# Altium PCB 2015_AlimBeaconEye.PCBDOC
Units mm, origin at the board's own origin, x right, y up, seen from the top; angles counter-clockwise.
Board outline 60 x 76 mm, 4 copper layers (1-TOP, 2-GND, 3-SIGNAL, 4-BOTTOM); 24 components, 10 nets, 51 pads, 49 vias.
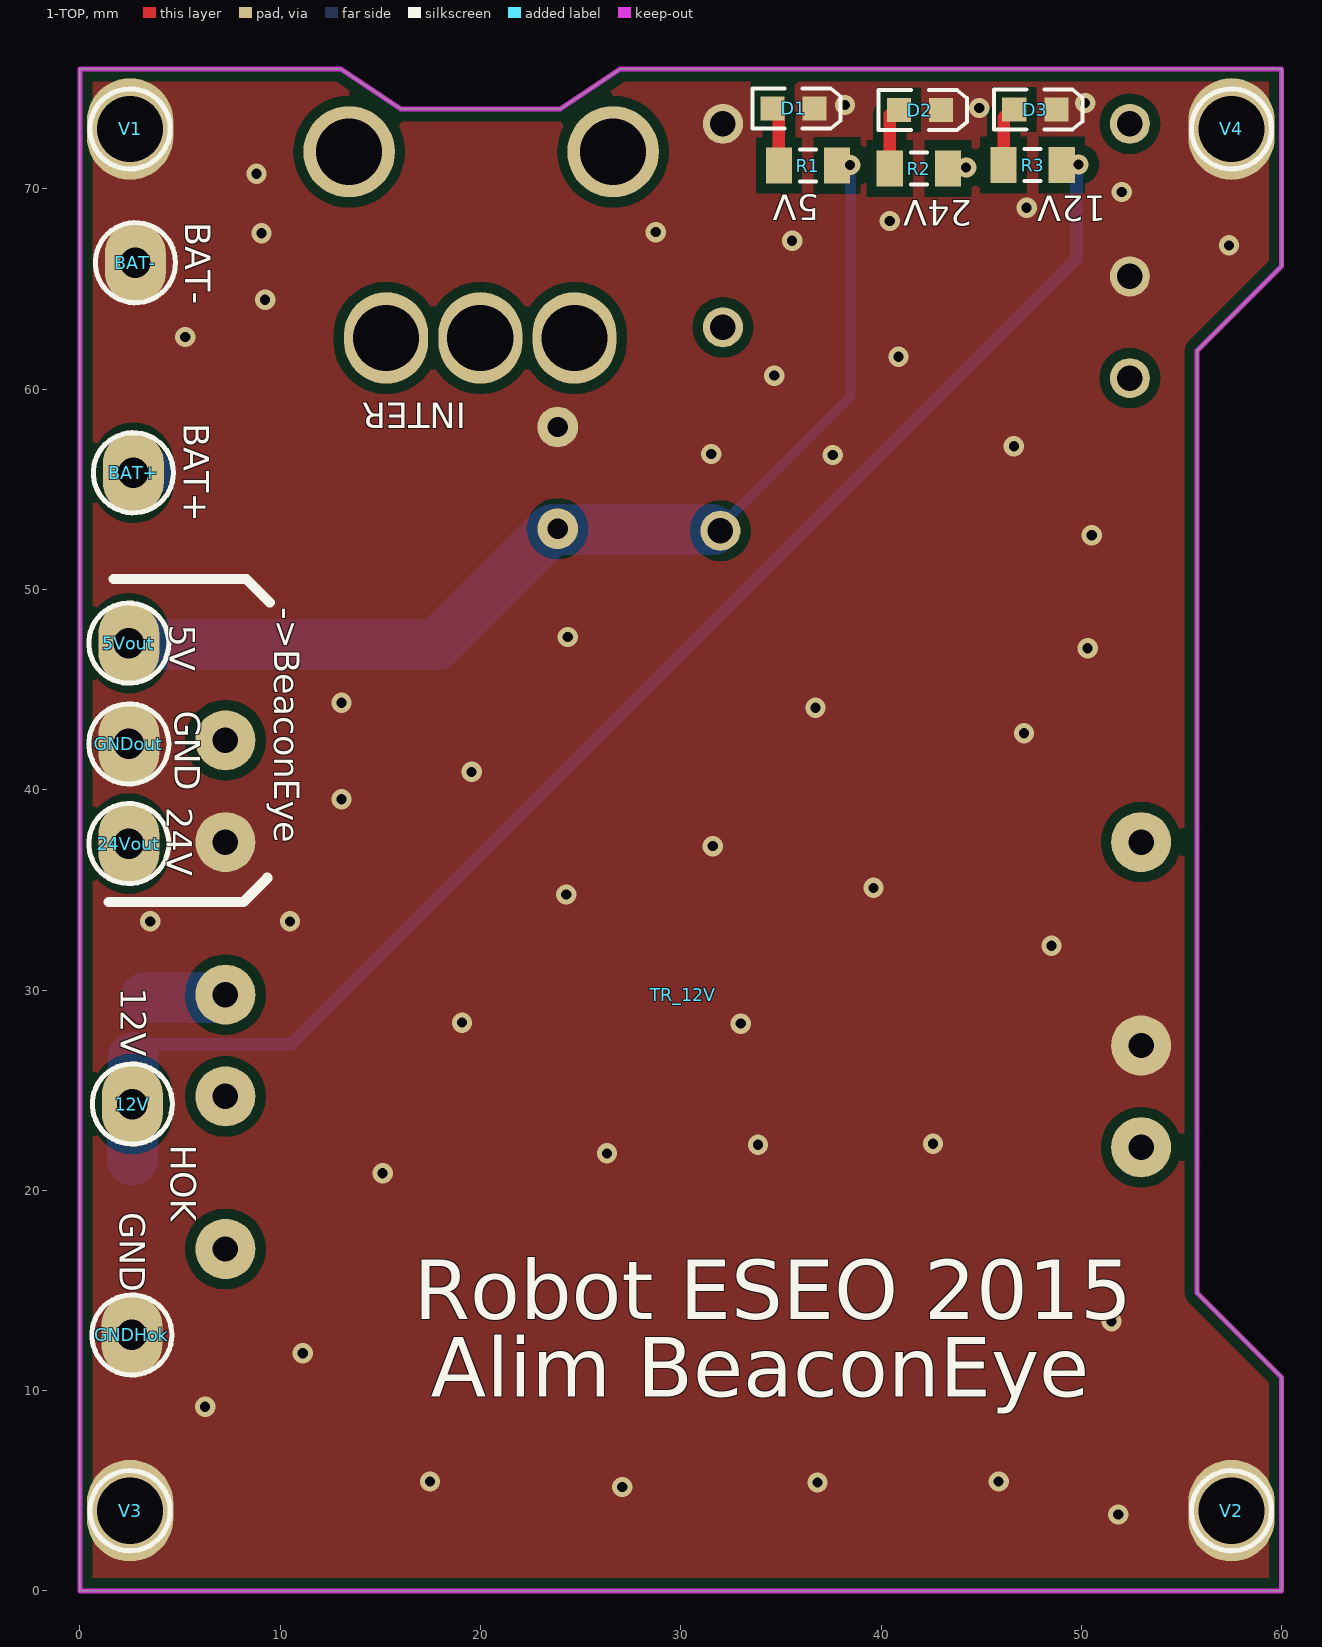
[diagram p0: 1-TOP view]
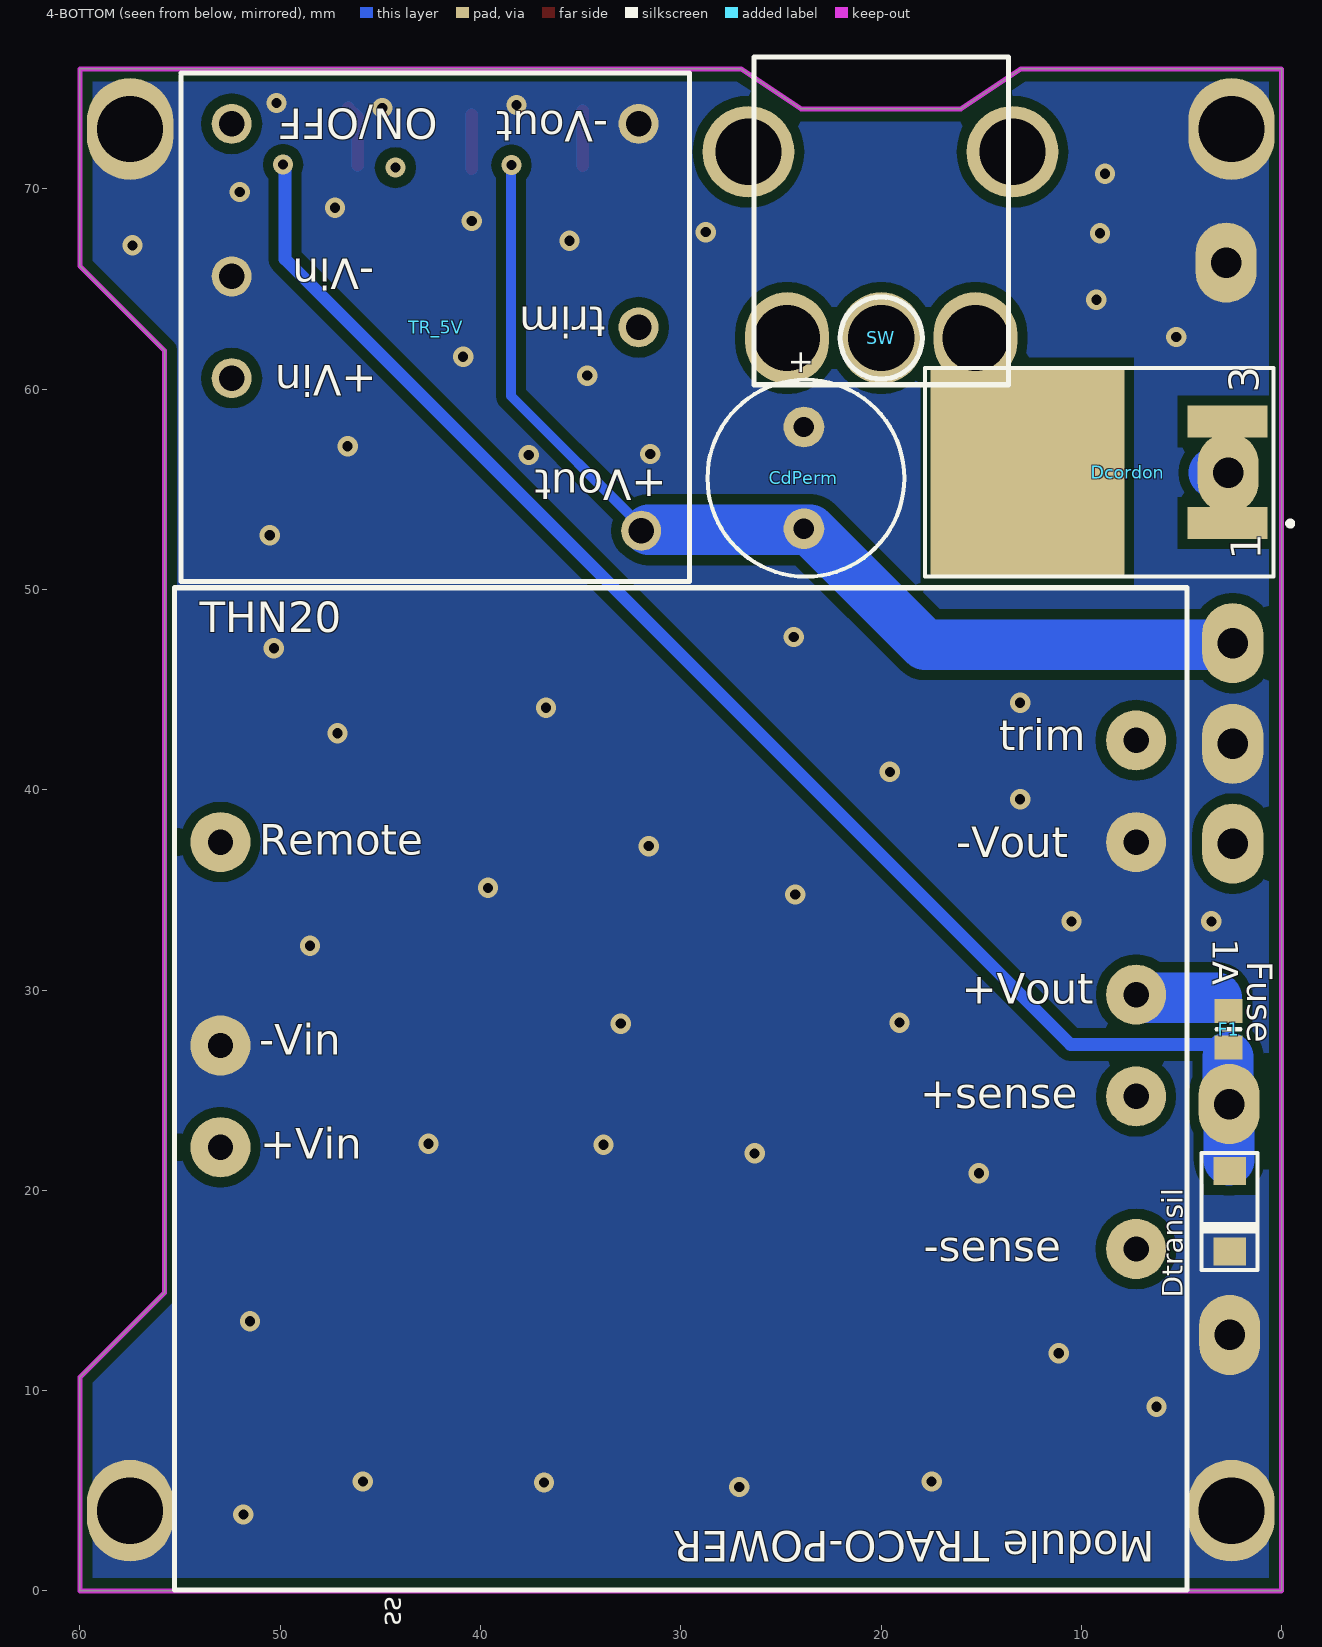
[diagram p1: 4-BOTTOM view, seen from below]
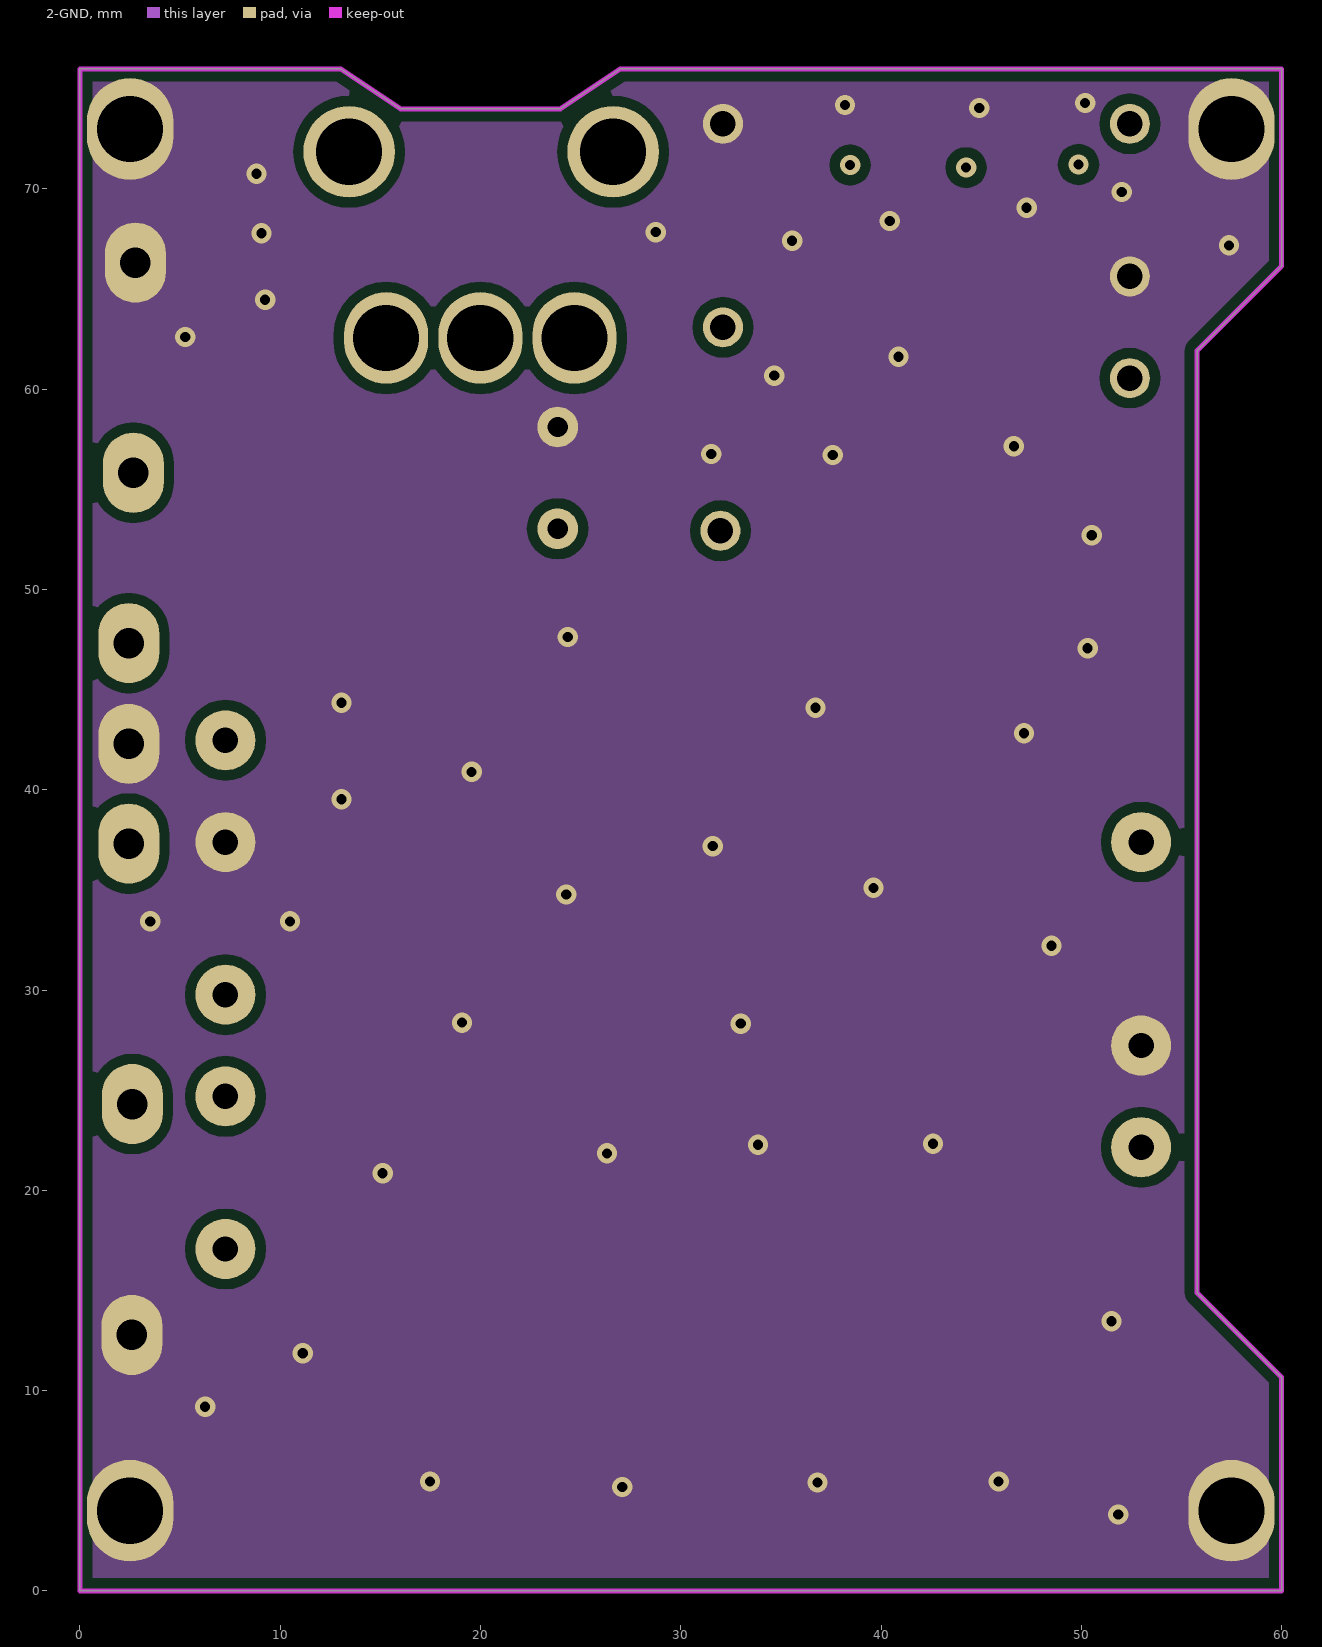
[diagram p2: 2-GND]
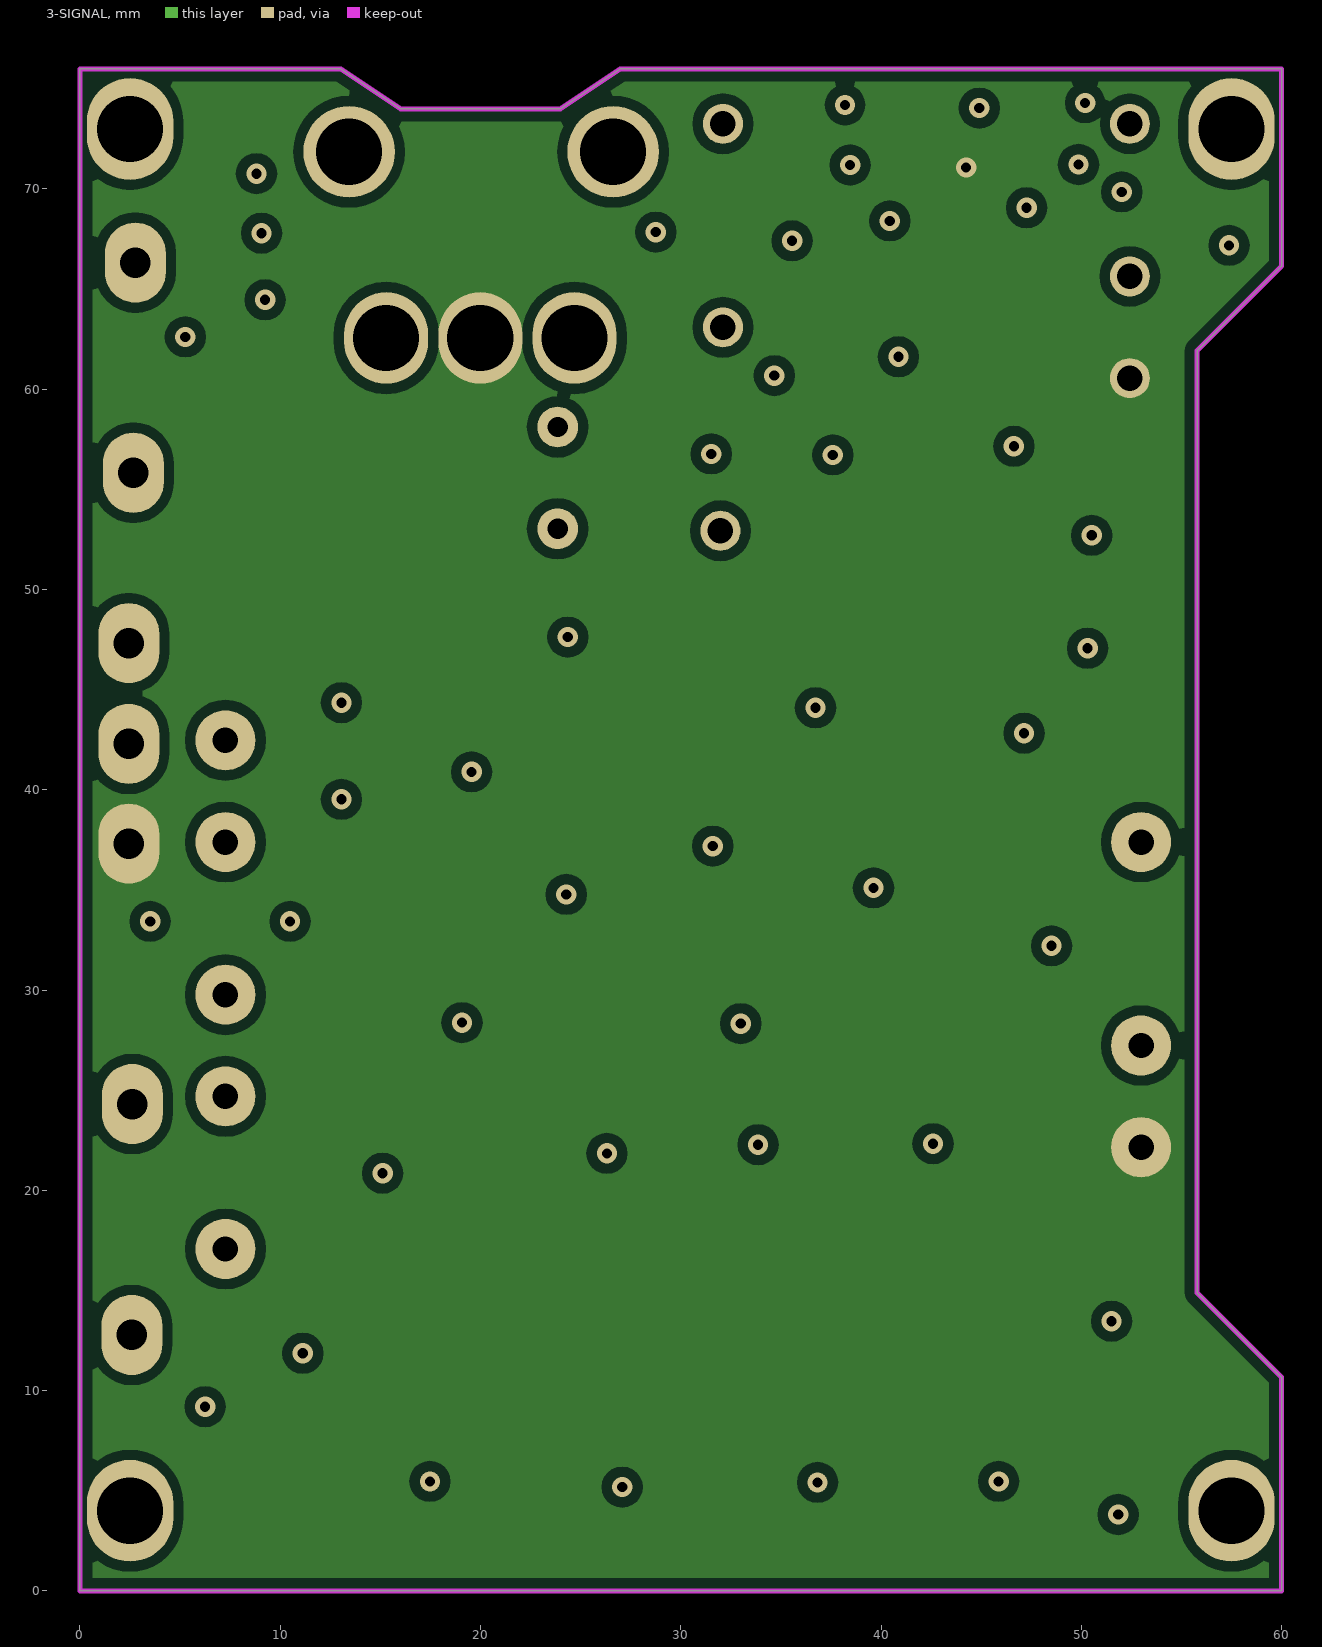
[diagram p3: 3-SIGNAL]
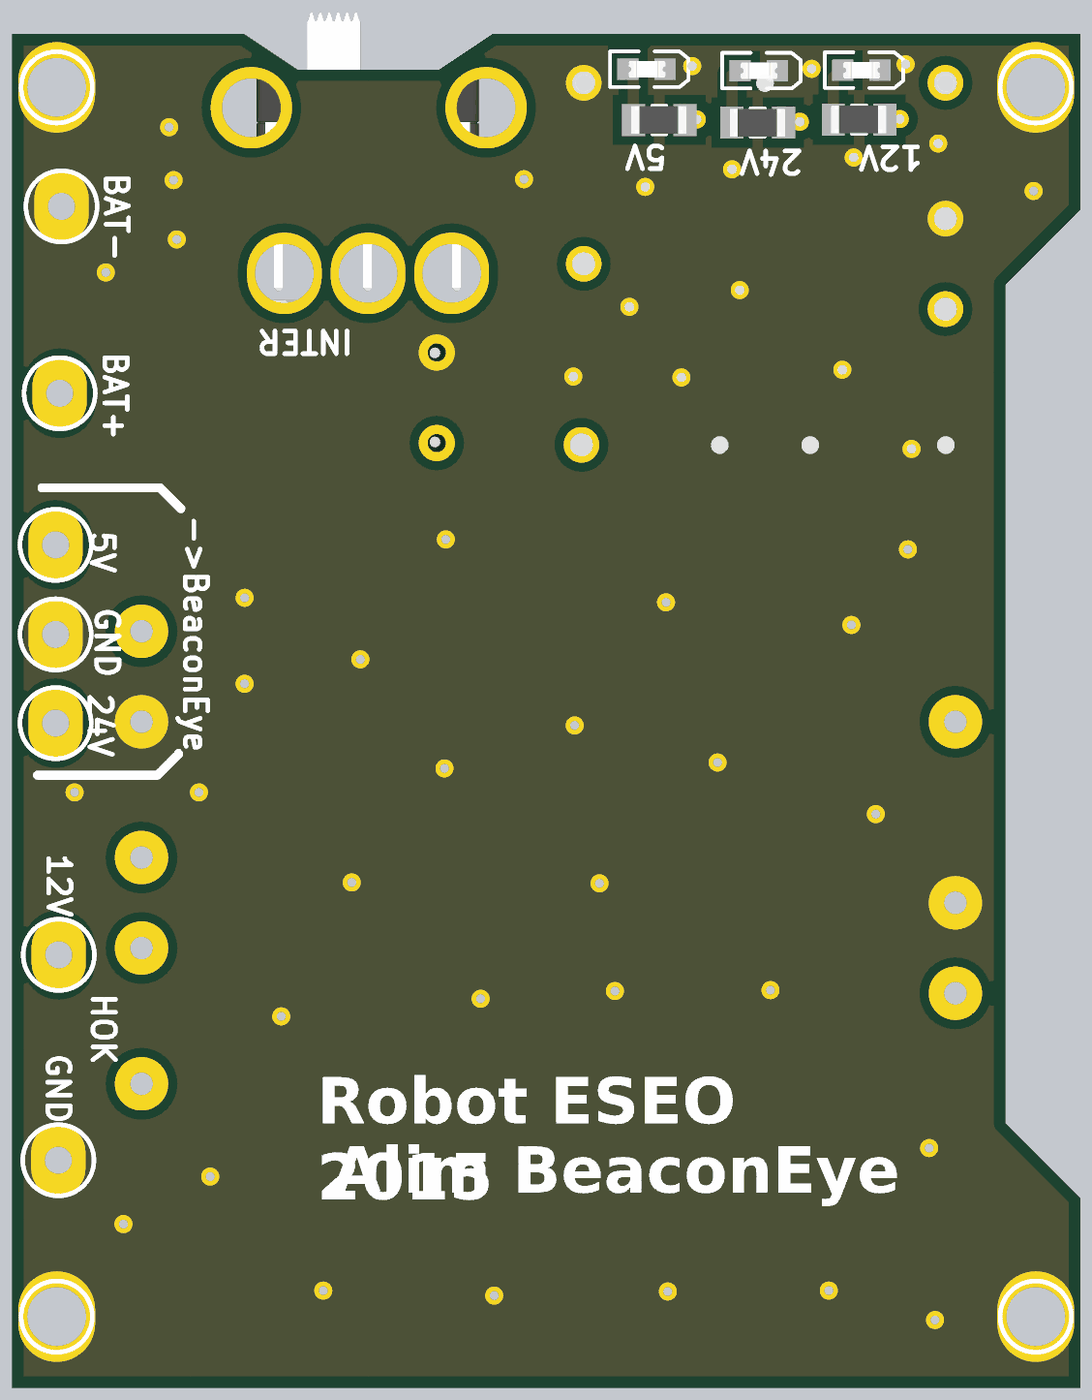
[diagram p4: 3D render of the assembled board from above, using the file's embedded part models]
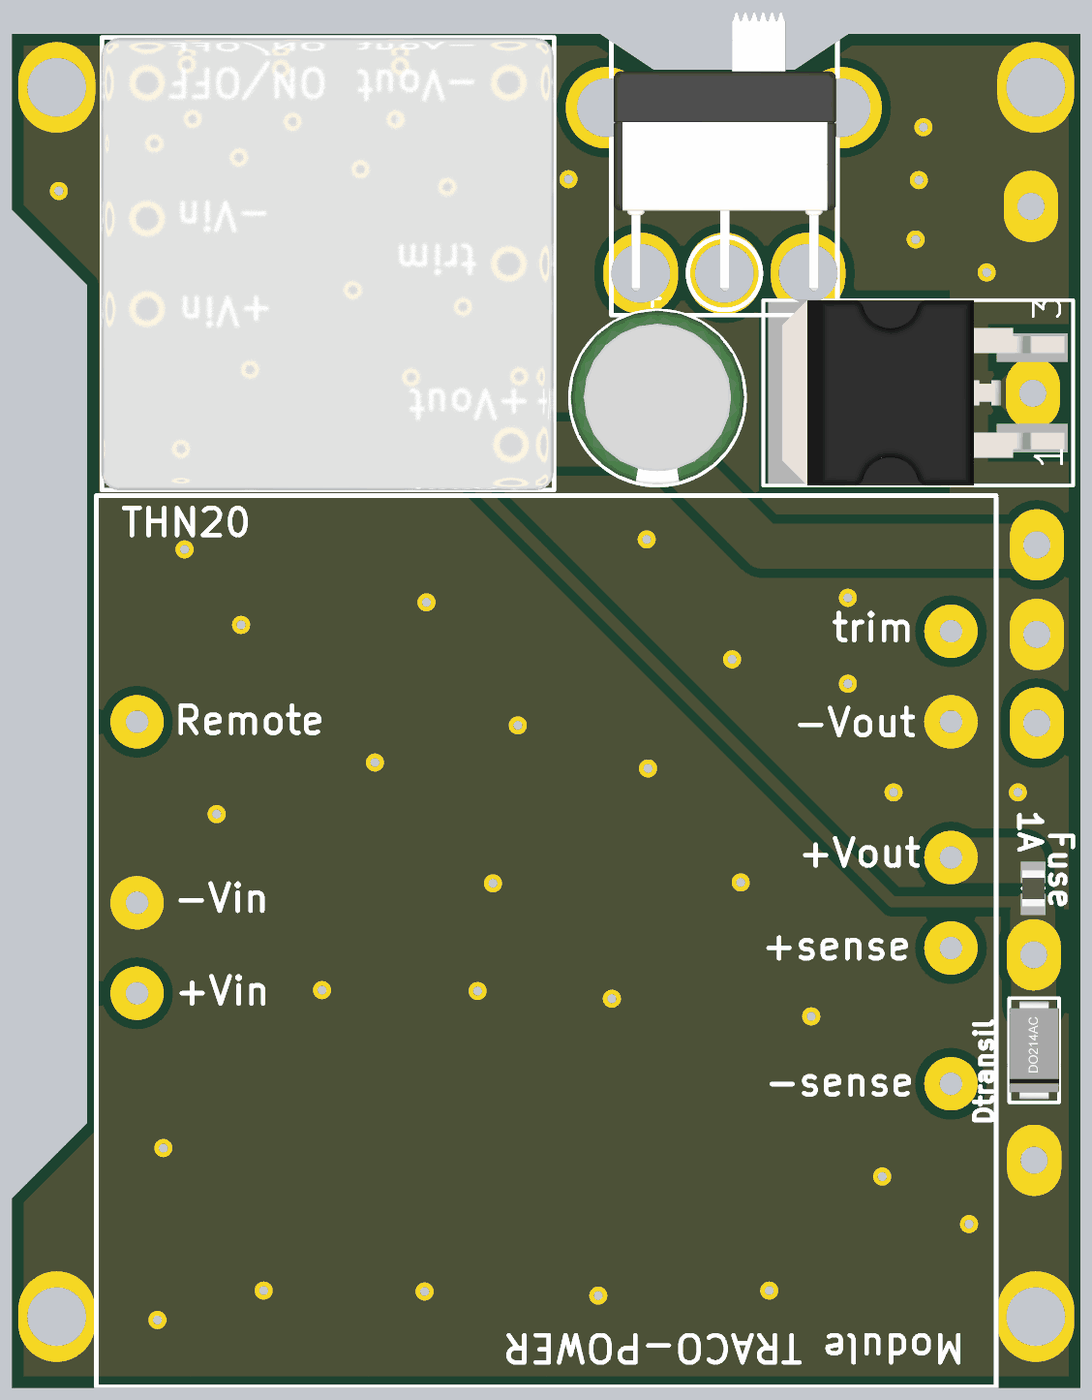
[diagram p5: 3D render of the assembled board from below, using the file's embedded part models]

## Layer stack, top to bottom
Top Solder: solder mask 0.0102, Solder Resist, Dk 3.5
1-TOP: signal copper 0.0356
Dielectric1: prepreg 0.32, FR-4, Dk 4.8
2-GND: signal copper 0.0356
Dielectric2: core 0.32, FR-4, Dk 4.8
3-SIGNAL: signal copper 0.0356
Dielectric3: prepreg 0.32, FR-4, Dk 4.8
4-BOTTOM: signal copper 0.0356
Bottom Solder: solder mask 0.0102, Solder Resist, Dk 3.5

## Board outline
0,0 0,76 13,76 16,74 24,74 27,76 60,76 60,66.147 55.778,61.925 55.778,14.884 60,10.663 60,0

## Design rules (kind name [scope] priority, off if disabled: settings)
Clearance Clearance_1 [InNamedPolygon('4-GND') Or  InNamedPolygon('3-GND') Or InNamedPolygon('2-GND') Or InNamedPolygon('1-GND')] p1: gap=0.508
Clearance [All] p2: gap=0.178
FabricationTestPointUsage TestPointUsage [All] p1: valid=0 allowmultiple=FALSE
FabricationTestpoint Testpoint [All] p1: side=3 testpointundercomponent=TRUE minsize=1.016 maxsize=2.54 preferedsize=1.524 minholesize=0 maxholesize=1.016 preferedholesize=0.813 testpointgrid=0.025 allowsidetop=TRUE allowsidebottom=TRUE usegrid=TRUE gridtolerance=0
PlaneClearance [All] p1: clearance=0.254
PlaneConnect [All] p1: planeconnectstyle=Direct reliefexpansion=0.635 reliefentries=4 reliefconductorwidth=0.305 reliefairgap=0.381
PolygonConnect [All] p1: connectstyle=Direct reliefconductorwidth=0.254 reliefentries=4 polygonreliefangle="90 Angle" airgapwidth=0.254
RoomDefinition 2015_AlimBeaconEye [InComponentClass('2015_AlimBeaconEye')] p1: confinementstyle=ConfineIn formatcopy=TRUE lockcomponents=FALSE outline 79.136,0.914 299.126,0.914 299.126,54.762 79.136,54.762
RoutingLayers RoutingLayers_1 [All] p1: top layer_v5=TRUE mid layer 1_v5=FALSE mid layer 2_v5=FALSE bottom layer_v5=TRUE
RoutingLayers [All] p2: top layer_v5=TRUE mid layer 1_v5=FALSE mid layer 2_v5=FALSE bottom layer_v5=TRUE
RoutingVias [All] p1: holewidth=0.711 width=1.27 viastyle="Through Hole" minholewidth=0.711 minwidth=1.27 maxholewidth=0.711 maxwidth=1.27
SilkToSolderMaskClearance SilkscreenOverComponentPads [IsPad] p1: minsilkscreentomaskgap=0.254 clearancetoexposedcopper=TRUE
SolderMaskExpansion [All] p1: expansion=0
Width [All] p1: maxlimit=3.81 minlimit=0.305 preferedwidth=0.381
23 further rules are at their usual default settings.

## Components (designator, comment, footprint, x,y, rotation, side; value= is the part's Value field where it differs from the comment)
5Vout "Pad_M3" M3x6mm#1 2.438,47.32 r0 top
12V "Pad_M3" M3x6mm#1 2.616,24.308 r0 top
24Vout "Pad_M3" M3x6mm#1 2.438,37.313 r0 top
BAT+ "Pad_M3" M3x6mm#1 2.667,55.829 r180 top
BAT- "Pad_M3" M3x6mm#1 2.769,66.319 r180 top
CdPerm "100uF" CONDENSATEUR_POLARISE_ELECTROLYTIQUE_RADIAL_5.08/8.9 23.851,58.115 r270 bottom
D1 "Verte" LED_0805 35.636,74.018 r0 top
D2 "Orange" LED_0805 41.935,73.937 r0 top
D3 "Jaune" LED_0805 47.701,73.968 r0 top
Dcordon "VS-42CTQ030SPBF" "D2Pak (123)" 2.692,53.315 r90 bottom
Dtransil "SMA6J12CA" DO214AC 2.591,18.948 r90 bottom
F1 "Fusible_1A_Fast" R0805_N 2.642,28.042 r270 bottom
GNDHok "Pad_M3" M3x6mm#1 2.591,12.776 r0 top
GNDout "Pad_M3" M3x6mm#1 2.438,42.291 r0 top
R1 "1k" R1206_N 36.347,71.168 r180 top
R2 "4.7k" R1206_N 41.885,71.021 r180 top
R3 "4.7k" R1206_N 47.574,71.193 r180 top
SW "1101M2S4AQE2" "SW_UNIPOL_DROIT - APEM 18235" 13.64,59.004 r90 bottom
TR_5V "TRACO THN 20-4811Wi" TRACO_THN20 54.966,75.794 r180 bottom
TR_12V "TRACO_12V_5A" TRACO_SIMPLE_12V_5A 4.724,50.089 r0 top
V1 "Pad_M3" M3x6mm#2 2.5,73 r0 top
V2 "Pad_M3" M3x6mm#2 57.5,4 r0 top
V3 "Pad_M3" M3x6mm#2 2.5,4 r0 top
V4 "Pad_M3" M3x6mm#2 57.5,73 r0 top

## Footprints (in the part's own frame and the unit in brackets; to place one, negate y for a bottom-side part, rotate by r counter-clockwise, add the part's x,y. Pads: shape width x height; smd on the part's side, far side on the other; paste and mask are expansions set on the pad)
CONDENSATEUR_POLARISE_ELECTROLYTIQUE_RADIAL_5.08/8.9 [mil] "CONDENSATEUR_POLARISE_ELECTROLYTIQUE_RADIAL ; DIAMETRE : 8.9mm ; ESPACEMENT BROCHES : 5.08mm"
  round 80 hole 40: 1(0,0) 2(200,0)
  silkscreen extent -93,-190 294,197, body extent -93,-188 291,196, height 485
"D2Pak (123)" [mm] "D2-PAK; 3 Leads (1 Cropped); Body 15.2 (inc. leads) x 10.9 mm (LxW max)"
  rect 1.61x4 smd: 1(0,0) 3(5.08,0)
  rect 10.49x9.68 smd: 2(2.54,10)
  silkscreen extent -2.67,-3.25 7.75,15.11, body extent -2.66,-1.8 7.74,14.05, height 4.6
DO214AC [mm] "Diode"
  rect 1.4x1.64 smd: 1(-2.015,0) 2(2.015,0)
  silkscreen extent -2.92,-1.4 2.92,1.4, body extent -2.74,-1.4 2.74,1.4, height 2.27
LED_0805 [mm] "SM LED; 2 Flat Leads"
  rect 1.2x1.2 smd: 1(-1.05,0) 2(1.05,0)
  silkscreen extent -2.05,-1 2.35,1, body extent -1.05,-0.64 1.06,0.64, height 1.2
M3x6mm#1 [mil] "Vis M3 X 6mm"
  oval 120x157.48 hole 60: 1(0,0)
  silkscreen extent -79,-79 79,79
M3x6mm#2 [mil] "Vis M3 X 6mm"
  oval 170x200 hole 130: 1(0,0)
  silkscreen extent -79,-79 79,79
R0805_N [mm] "Chip Resistor, Body 2.0x1.3mm, IPC Medium Density"
  rect 1.2x1.4 smd: 1(-0.9,0) 2(0.9,0)
  silkscreen extent 0,-0.6 0,0.6, body extent -1.07,-0.7 1.07,0.7, height 0.65
R1206_N [mm] "Chip Resistor, Body 3.2x1.6mm, IPC Medium Density"
  rect 1.3x1.8 smd: 1(-1.45,0) 2(1.45,0)
  silkscreen extent -0.4,-0.8 0.4,0.8, body extent -1.68,-0.87 1.68,0.87, height 0.71
"SW_UNIPOL_DROIT - APEM 18235" [mil]
  oval 180x165 hole 130: COMMON1(140,250) NC1(140,435.04) NO1(140,64.96)
  silkscreen extent 48,0 692,500, body extent 101,3 717,495, height 305
TRACO_SIMPLE_12V_5A [mm] "DoubleTRACO-POWER module"
  round 3 hole 1.27: 1(48.26,-27.94) 2(48.26,-22.86) 3(48.26,-12.7) 4(2.54,-33.02) 5(2.54,-25.4) 6(2.54,-20.32) 7(2.54,-12.7) 8(2.54,-7.62)
  body extent -0.13,-50.04 50.67,0.13
TRACO_THN20 [mm] "THN20"
  round 2 hole 1.27: 1(2.54,-15.24) 2(2.54,-10.16) 3(22.987,-22.86) 4(22.86,-12.7) 5(22.86,-2.54) 6(2.54,-2.54)
  silkscreen extent 0,-25.4 25.4,0, body extent -0.02,-25.41 25.38,-0.01, height 9.9

## Part data
5Vout 12V 24Vout BAT+ BAT- GNDHok GNDout V1 V2 V3 V4: library part "Vis M3 X 6mm _TORX_Tête 6mm", "Vis M3 X 6mm _TORX_Tête 6mm"
CdPerm: library part "Condensateur Polarise Traversant", "Polarized Capacitor"
D1 D2 D3: library part LED, "Typical LED"
Dcordon: library part "Diode Shottky double BAT54C", "DIODE SCHOTTKY DOUBLE"
Dtransil: library part "Diode 1N4001", "1 Amp General Purpose Rectifier"
F1: library part Fusible_SMD, "Fuse"
R1 R2 R3: library part Resistor, "Resistor"
SW: library part "SW SPDT- APEM Série 523x", "Switch unipolaire a levier"
TR_5V: "Traco 20W 24V to 5V*4A"

## Free pads (board coordinates)
  round 4.572 hole 3.302: 0(26.619,71.857) 1(13.437,71.857)

## Via types
v1: diameter 1.016, hole 0.508, 1-TOP to 4-BOTTOM, 49 vias

## Nets (pads, with @x,y where several pads share a name; then routed paths per layer and width w, separated by ;. In a path a pad name is that pad's centre, name@x,y a point inside that pad or via, vN(x,y) a via of type N, cw(c..) or ccw(c..) an arc to the next point about the centre after c; other vN are vias at no path point)
5V: 5Vout.1 CdPerm.2 R1.1 TR_5V.3 | length 53.6
  4-BOTTOM w0.508: 30.683,53.01 31.826,53.01 38.481,59.665 v1@38.481,71.069
  4-BOTTOM w2.54: 5Vout.1@2.286,47.244 17.805,47.244 23.546,52.984 TR_5V.3@31.598,52.984
  other v1: 38.456,71.196
12V: F1.1 TR_12V.6 | length 3.4
  4-BOTTOM w2.54: 3.251,29.616 TR_12V.6@6.69,29.616
12VHOK: 12V.1 Dtransil.2 F1.2 R3.1 | length 74.3
  4-BOTTOM w0.635: F1.2@2.311,27.28 10.541,27.28 49.759,66.497 v1@49.759,71.374 ; Dtransil.2@2.794,21.311 Dtransil.2@2.921,21.184
  4-BOTTOM w2.54: Dtransil.2@2.616,21.514 12V.1 ; 12V.1@2.667,23.851 F1.2@2.667,26.645
  other v1: 49.86,71.222
24V: 24Vout.1 R2.1 SW.COMMON1 TR_5V.1 TR_12V.1
  other v1: 44.247,71.069
24VIN: BAT+.1 Dcordon.1 Dcordon.3 | length 0.7
  4-BOTTOM w2.54: BAT+.1 BAT+.1@3.378,55.829
GND: BAT-.1 CdPerm.1 D1.2 D2.2 D3.2 Dtransil.1 GNDHok.1 GNDout.1 TR_5V.2 TR_5V.5 TR_12V.2 TR_12V.7 V1.1 V2.1 V3.1 V4.1
  other v1: 51.841,3.81 27.076,5.182 36.83,5.41 17.475,5.461 45.872,5.461 6.248,9.195 11.125,11.862 51.511,13.462 15.113,20.853 26.314,21.844 33.858,22.276 42.596,22.327 32.995,28.321 19.075,28.372 48.514,32.207 3.505,33.426 10.49,33.426 24.282,34.773 39.624,35.103 31.598,37.186 13.056,39.522 19.558,40.894 47.142,42.824 36.728,44.094 13.056,44.348 50.317,47.066 24.359,47.625 50.521,52.705 37.592,56.718 31.521,56.769 46.634,57.15 34.671,60.681 40.869,61.62 5.258,62.611 9.246,64.465 57.379,67.183 35.56,67.412 9.068,67.793 28.753,67.843 40.437,68.402 47.269,69.063 52.019,69.85 8.814,70.764 44.907,74.041 38.202,74.193 50.19,74.295
NetD1_1: D1.1 R1.2 | length 2.7
  1-TOP w0.635: R1.2 D1.1@34.897,73.891
NetD2_1: D2.1 R2.2 | length 2.7
  1-TOP w0.635: R2.2 D2.1@40.435,73.709
NetD3_1: D3.1 R3.2 | length 3
  1-TOP w0.635: R3.2 46.124,73.556 D3.1@46.609,74.041
NetDcordon_2: Dcordon.2 SW.NO1
pads on no net: SW.NC1 TR_5V.4 TR_5V.6 TR_12V.3 TR_12V.4 TR_12V.5 TR_12V.8

## Polygon pours and split planes (outlines as drawn)
GND on 4-BOTTOM "4-GND" (solid, remove dead copper, pour order 8): -5.004,78.003 59.995,78.003 59.995,0 -5.004,0
GND on 1-TOP "1-GND" (solid, remove dead copper, pour order 5): -4.978,78.003 60.046,78.003 60.046,0 -4.978,0
24V on 3-SIGNAL "3-GND" (solid, remove dead copper, pour order 7): -5.004,78.003 59.995,78.003 59.995,0 -5.004,0
GND on 2-GND "2-GND" (solid, remove dead copper, pour order 6): -5.004,78.003 59.995,78.003 59.995,0 -5.004,0

## Keep-outs
Keep-Out Layer:
  the board outline again, w0.254

## Silkscreen, mask and mechanical layers (free items; w line width, h text height)
Top Overlay:
  lines w0.508: 1.422,34.392 8.153,34.392 9.347,35.585 9.347,35.611 ; 1.676,50.521 8.306,50.521 9.474,49.352
  text "5V" at 36.906,69.723 h1.27 r180
  text "12V" at 51.257,69.672 h1.27 r180
  text "24V" at 44.552,69.444 h1.27 r180
  text "BAT-" at 5.258,68.326 h1.27 r270
  text "INTER" at 19.279,59.334 h1.27 r180
  text "BAT+" at 5.182,58.293 h1.27 r270
  text "->BeaconEye" at 9.703,49.124 h1.27 r270
  text "5V" at 4.47,48.235 h1.27 r270
  text "GND" at 4.724,43.942 h1.27 r270
  text "24V" at 4.343,39.116 h1.27 r270
  text "12V" at 2.032,30.124 h1.27 r270
  text "HOK" at 4.521,22.276 h1.27 r270
  text "GND" at 1.981,18.898 h1.27 r270
  text "Robot ESEO 2015" at 16.662,12.598 h5.08
  text "Alim BeaconEye" at 17.526,8.712 h5.08
Bottom Overlay:
  text "1A" at 3.429,32.563 h1.27 r90
  text "Fuse" at 1.702,31.445 h1.27 r90
  text "Ass" at 44.764,-2.693 h1.02 r90

## Dimensions
0,76 to 2.5,73 on Mechanical 15
2.5,4 to 57.5,4 on Mechanical 15
57.5,4 to 57.5,73 on Mechanical 15
60,0 to 60,76 on Mechanical 15
60,0 to 57.5,4 on Mechanical 15
57.5,4 to 60,0 on Mechanical 15
0,0 to 60,0 on Mechanical 15
0,0 to 2.5,4 on Mechanical 15

## Text inside footprints (layer, text, board x,y; h text height)
CdPerm: Bottom Overlay "+" at 24.491,61.995 h1.14 r90
Dcordon: Bottom Overlay "1" at 1.041,51.486 h1.5 r270; Bottom Overlay "3" at 1.143,59.817 h1.5 r270
TR_5V: Bottom Overlay "+Vout" at 30.709,55.982 h1.52 r180; Bottom Overlay "-Vout" at 33.63,73.889 h1.52 r180; Bottom Overlay "+Vin" at 45.187,61.189 h1.52 r180; Bottom Overlay "-Vin" at 45.314,66.523 h1.52 r180; Bottom Overlay "THN20" at 54.026,47.854 h1.52; Bottom Overlay "ON/OFF" at 42.139,74.016 h1.52 r180; Bottom Overlay "trim" at 33.757,64.11 h1.52 r180
TR_12V: Bottom Overlay "-Vout" at 16.256,36.627 h1.52; Bottom Overlay "+sense" at 18.034,24.105 h1.52; Bottom Overlay "+Vout" at 15.977,29.312 h1.52; Bottom Overlay "-sense" at 17.856,16.459 h1.52; Bottom Overlay "trim" at 14.097,41.961 h1.52; Bottom Overlay "Module TRACO-POWER" at 6.325,2.972 h1.52 r180; Bottom Overlay "-Vin" at 51.054,26.772 h1.52; Bottom Overlay "+Vin" at 51.003,21.565 h1.52; Bottom Overlay "Remote" at 51.054,36.754 h1.52